# Altium PCB EVB_MBD_AK376xE_V1.0.0.PcbDoc (part 5 of 5)
Units mil, origin at the board's own origin, x right, y up, seen from the top; angles counter-clockwise.
Board outline 7060.01 x 5460.01 mil, 4 copper layers (Top, Layer 1, Layer 2, Bottom), stack 5.512 mil thick; 344 components, 305 nets, 1421 pads, 1325 vias.
Unrouted connection lines stored in the file: 947.
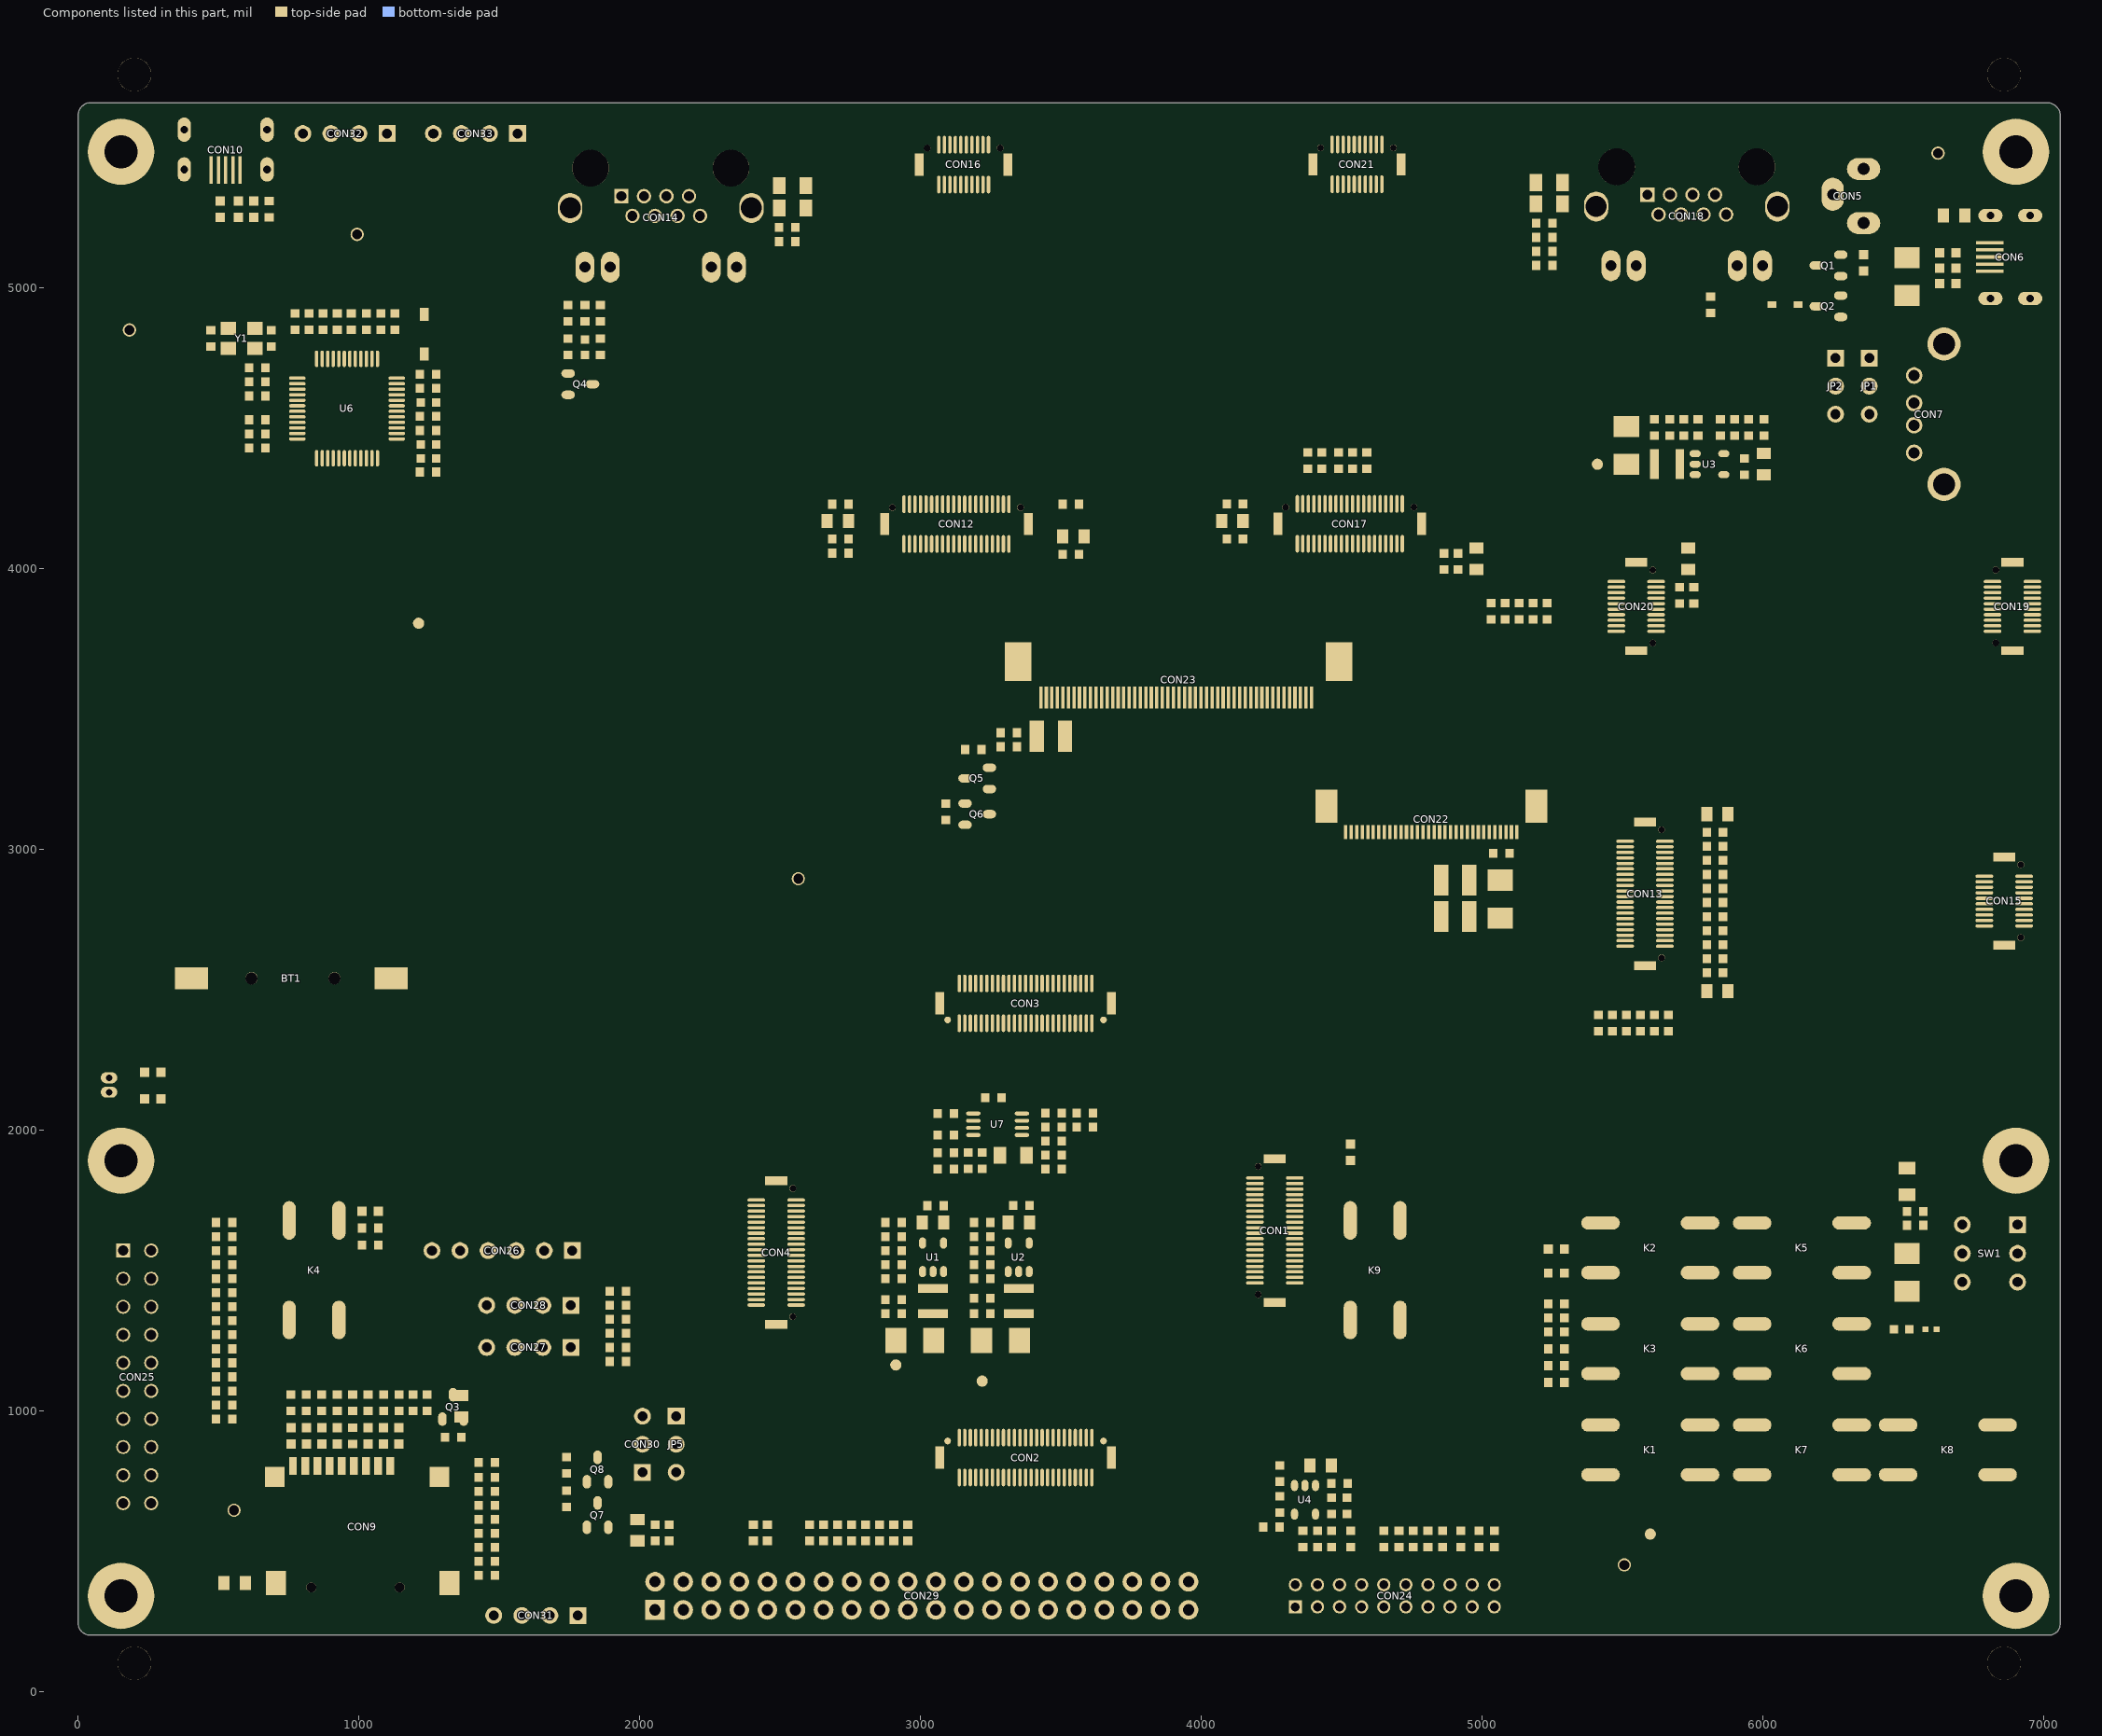
[diagram p7: the components of this part, seen from the top]

## Silkscreen, mask and mechanical layers (free items; w line width, h text height)
Silkscreen Top:
  region: 4373.6,2460 ccw(c4285,2460) 4285,2548.6 ccw(c4285,2460) 4196.4,2460 ccw(c4285,2460) 4285,2371.4 ccw(c4285,2460)
  lines w5: 6342.5,4220 6342.5,4480 ; 4435,655 4435,2625 2307.5,2625 2307.5,655 4435,655 ; 4435,655 4435,655 ; 2546.37,3951.92 3865.37,3951.92 3865.37,5616.92 2546.37,5616.92 2546.37,3951.92 ; 3947.63,3952.95 3947.63,5617.95 5266.63,5617.95 5266.63,3952.95 3947.63,3952.95 ; 5374.37,2102.86 7039.37,2102.86 7039.49,3421.86 5374.49,3421.86 5374.37,2102.86 ; 6150,4220 6150,4480 6432.5,4480 6432.5,4220 6150,4220 ; 6480,3595 6755,3595 6755,3875 6480,3875 6480,3595
  lines w10: 65,3012.64 655.55,3012.64 655.55,4115 65,4115 65,3012.64 ; 5340,3465 7040,3465 7040,4185 6700,4185 5340,4185 5340,3465
  text "GND" at 6705,5447.5 h25 r90
  text "GND" at 820,5405 h25 r90
  text "VDD" at 1115,5405 h25 r90
  text "U0_RX" at 915,5352.5 h25 r90
  text "U0_TX" at 1012.5,5347.5 h25 r90
  text "U0_RX" at 1385,5345 h25 r90
  text "U0_TX" at 1480,5340 h25 r90
  text "TTL_TX" at 1285,5320 h25 r90
  text "TTL_RX" at 1585,5310 h25 r90
  text "DC电源座" at 6560,5240 h100 r90
  text "GND" at 945,5155 h25 r90
  text "USB转串口座" at 277.5,5040 h100
  text "有线网口" at 5330,4895 h100
  text "Micro USB" at 6717.5,4860 h40
  text "有线网口" at 2115,4840 h100
  text "GND" at 270,4817.5 h25 r90
  text "网卡小板0连接座(兼容SDIO WiFi小板)" at 2678.53,4556.97 h70
  text "网卡小板1连接座(兼容SDIO WiFi小板)" at 4093.53,4556.97 h70
  text "USB_DP DM" at 6170,4425 h25
  text "AK_DP DM" at 6195,4370 h25
  text "WIFI_DP DM" at 6172.5,4315 h25
  text "USB" at 6775,4215 h40
  text "USB WiFi Module" at 5902.5,3932.5 h50
  text "天线头" at 6505,3712.5 h80
  text "喇叭区域" at 150,3530 h100
  text "RGB/MCU屏接口" at 3620,3315 h100
  text "MIPI屏接口" at 4335,2940 h100
  text "GND" at 2647.5,2862.5 h25 r90
  text "AK37E核心板" at 3135,2660 h100
  text "纽扣电池座" at 520,2610 h100
  text "+" at 70,2270 h100
  text "SDIO WiFi/EMMC Module" at 5690,2150 h50
  text "喇叭座" at 340,2120 h100
  text "-" at 75,2005 h100
  text "U1_RTS" at 1677.5,1677.5 h25 r90
  text "U1_CTS" at 1782.5,1677.5 h25 r90
  text "VDD_3V3" at 1575,1675 h25 r90
  text "GND" at 1277.5,1672.5 h25 r90
  text "U1_RX" at 1380,1672.5 h25 r90
  text "U1_TX" at 1480,1672.5 h25 r90
  text "UP" at 5580,1380 h30
  text "LEFT" at 6120,1380 h30
  text "GND" at 1217.5,1322.5 h25 r90
  text "U3_RX" at 1267.5,1322.5 h25 r90
  text "U3_TX" at 1320,1322.5 h25 r90
  text "3V3" at 1377.5,1322.5 h25 r90
  text "电源开关" at 6640,1255 h80
  text "U2_RX" at 1265,1177.5 h25 r90
  text "Reset" at 730,1175 h100
  text "GND" at 1217.5,1175 h25 r90
  text "U2_TX" at 1320,1175 h25 r90
  text "3V3" at 1377.5,1172.5 h25 r90
  text "POWER LED" at 6425,1170 h30
  text "Boot" at 4535,1160 h100
  text "RIGHT" at 6100,1040 h30
  text "DOWN" at 5550,1035 h30
  text "GND" at 1852.5,995 h25
  text "VDD_3V3" at 2202.5,965 h25
  text "VCC_3V6" at 1740,940 h25
  text "GND" at 1855,885 h25
  text "VDDIO_CSI0" at 2205,865 h25
  text "VDDIO_CSI" at 2207.5,765 h25
  text "HOME" at 5550,670 h30
  text "RETUN" at 6595,670 h30
  text "OK" at 6115,665 h30
  text "GND" at 632.5,612.5 h25 r90
  text "CAMERA连接座(镜头向外）" at 2997.5,517.5 h100
  text "I2S 接口" at 5092.5,510 h100
  text "GND" at 5595,420 h25 r90
  text "EVB_MBD_AK376xE_V1.0.0" at 5740,367.5 h40
  text "PBEVBD0A1XX 2020/8/10" at 5742.5,262.5 h40
  text "TF卡座" at 382.5,240 h100